# Altium PCB ECE315_F21.PcbDoc (part 1 of 2)
Units mil, origin at the board's own origin, x right, y up, seen from the top; angles counter-clockwise.
Board outline 3940 x 3940 mil, 2 copper layers (Top Layer, Bottom Layer); 72 components, 56 nets, 251 pads, 112 vias.
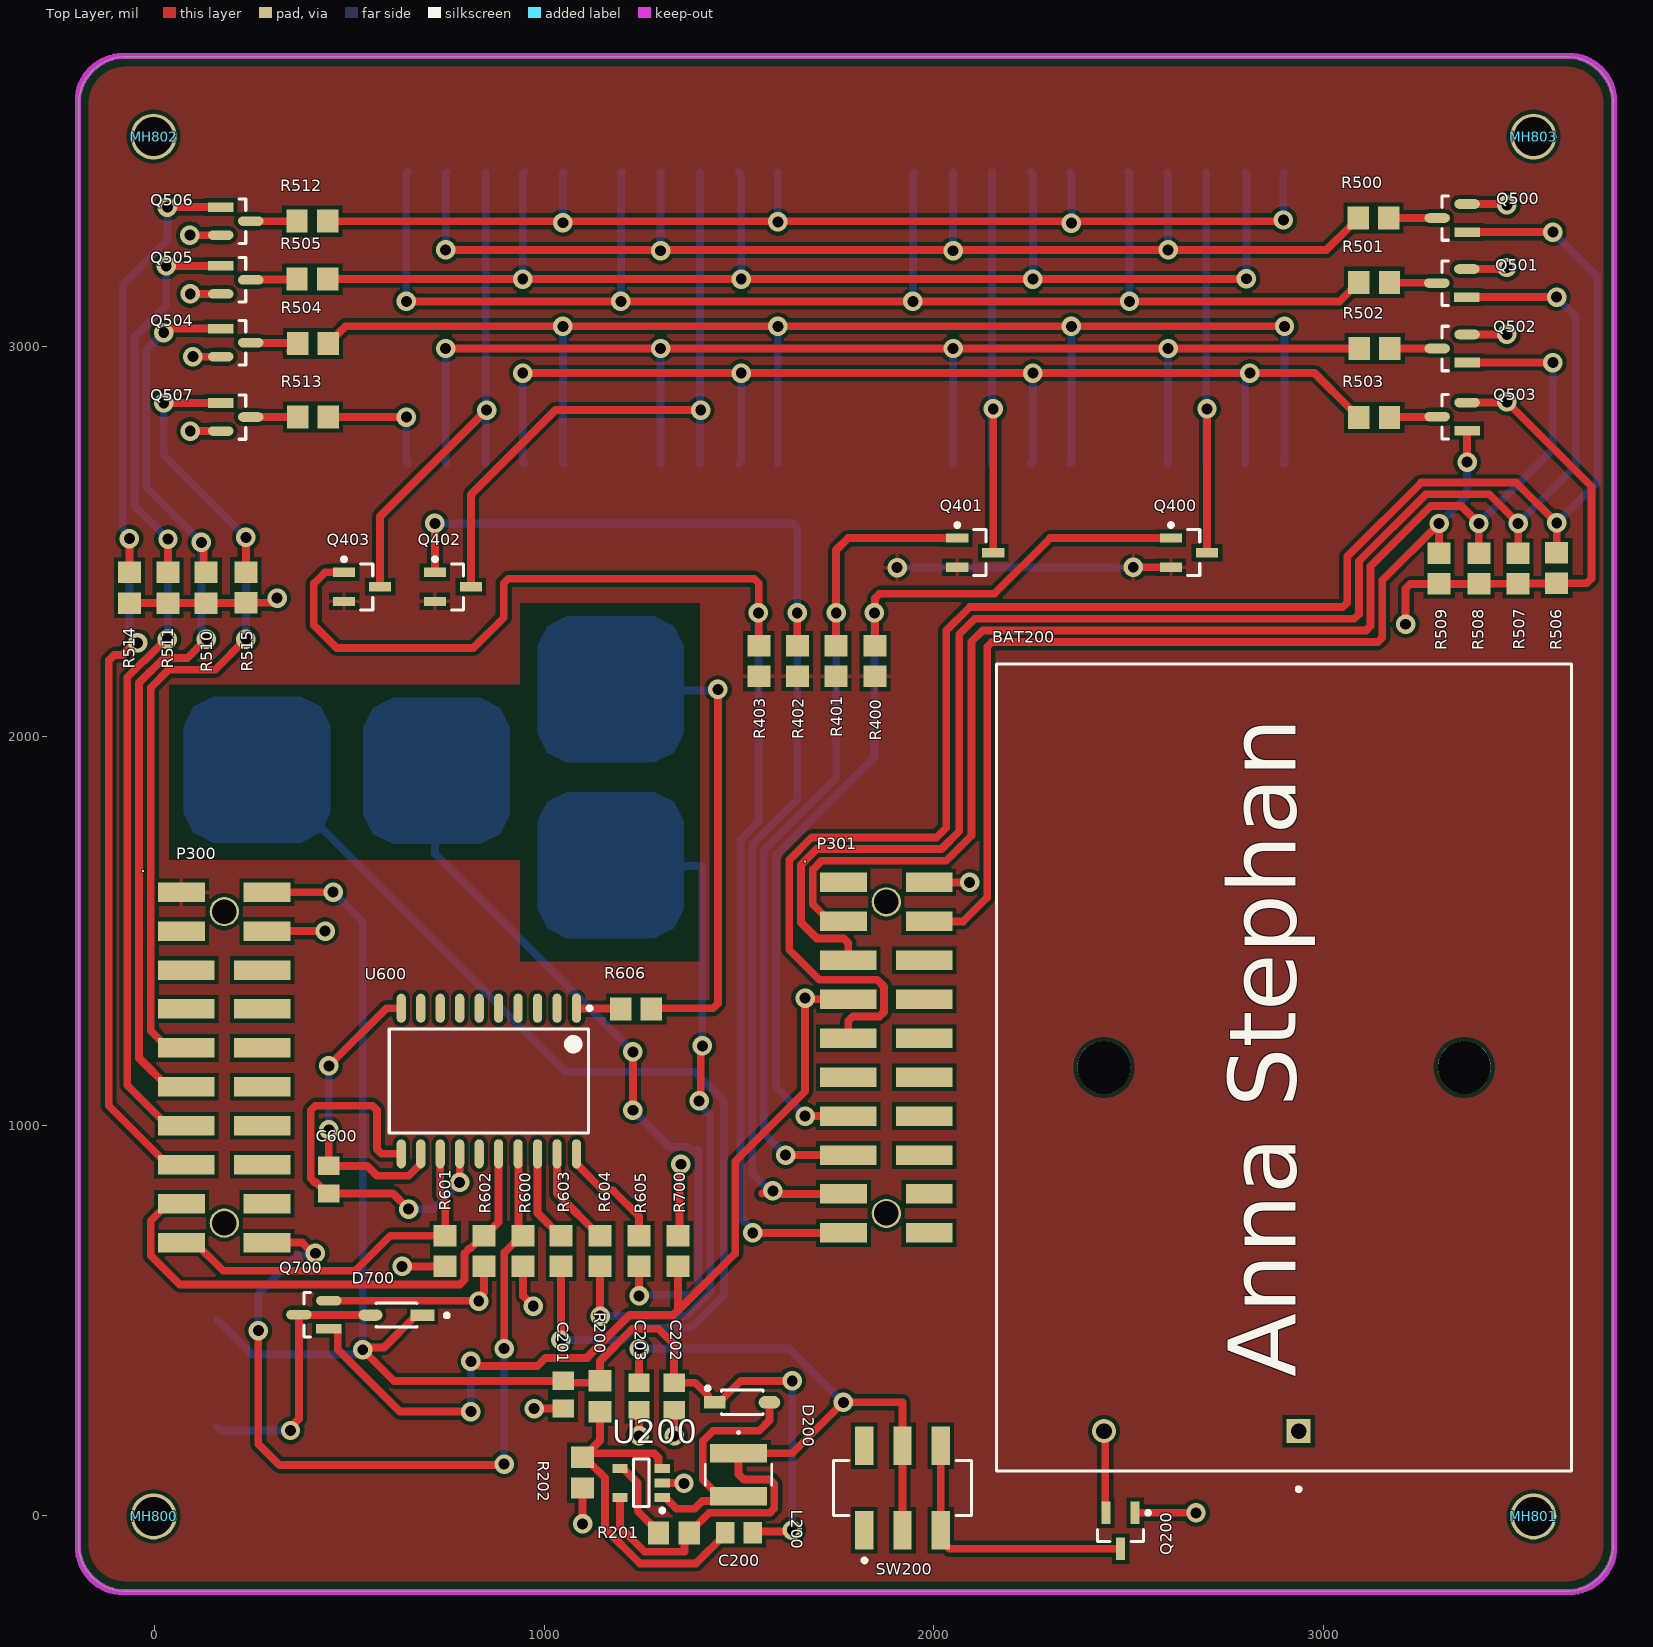
[diagram p0: Top Layer view]
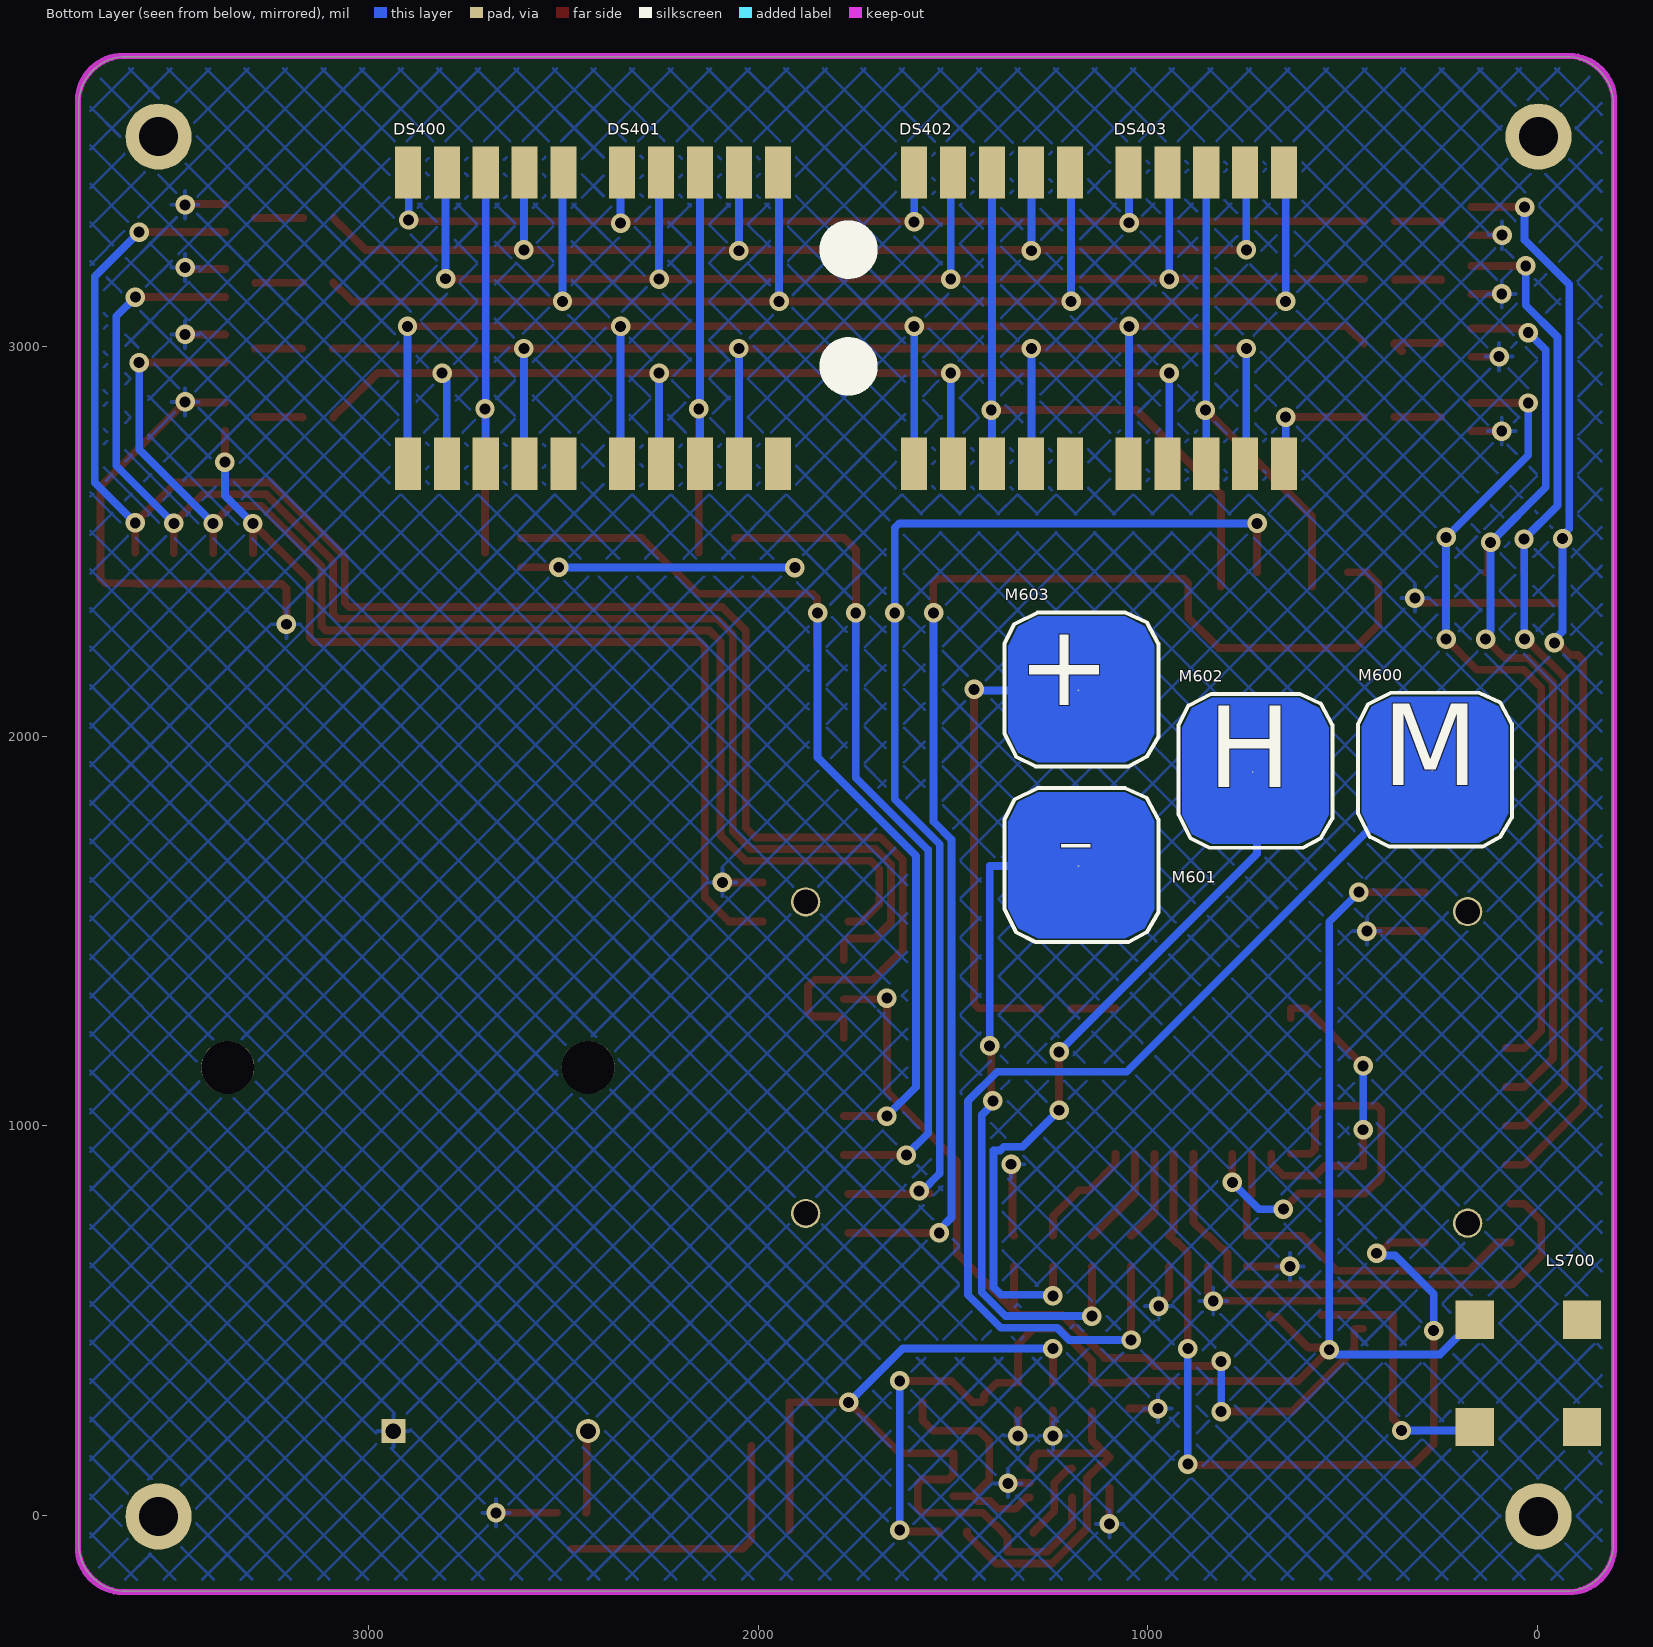
[diagram p1: Bottom Layer view, seen from below]

## Layer stack, top to bottom
Top Solder: solder mask 0.4, Solder Resist, Dk 3.5
Top Layer: signal copper 1.4
Dielectric 1: dielectric 12.6, FR-4, Dk 4.8
Bottom Layer: signal copper 1.4
Bottom Solder: solder mask 0.4, Solder Resist, Dk 3.5

## Board outline
-195,-75 -195,3625 cw(c-75,3625) -75,3745 3625,3745 cw(c3625,3625) 3745,3625 3745,-75 cw(c3625,-75) 3625,-195 -75,-195 cw(c-75,-75)

## Design rules (kind name [scope] priority, off if disabled: settings)
BoardOutlineClearance [All] p1: gap=25 ignorepadtopadclearanceinfootprint=FALSE
Clearance [All] p1: gap=10 ignorepadtopadclearanceinfootprint=FALSE except(0: Arc-Hole Track-Hole SMDPad-Hole THPad-Hole Via-Hole Fill-Hole Poly-Hole Region-Hole Text-Hole; 9: Arc-SMDPad Track-SMDPad SMDPad-SMDPad)
ComponentClearance [All] p1 off: gap=10 collisioncheckmode=3 verticalgap=10 showdistances=FALSE
HoleSize [All] p1: absolutevalues=TRUE maxlimit=200 minlimit=15 maxpercent=80.000 minpercent=20.000
MinimumAnnularRing [All] p1: minimumring=6
MinimumSolderMaskSliver [All] p1: minsoldermaskwidth=0
PolygonConnect [All] p1: connectstyle=Relief reliefconductorwidth=10 reliefentries=4 polygonreliefangle="90 Angle" airgapwidth=10
RoutingCorners [All] p1: cornerstyle=Round minsetback=100 maxsetback=100
RoutingVias [All] p1: holewidth=19.68 width=39.37 viastyle="Through Hole" minholewidth=15.75 minwidth=27.56 maxholewidth=27.56 maxwidth=7.87
SilkToSilkClearance [All] p1: silktosilkclearance=1
SilkToSolderMaskClearance [IsPad] p1: minsilkscreentomaskgap=0 clearancetoexposedcopper=TRUE
SolderMaskExpansion [All] p1: expansion=4 istentingtop=FALSE
Width Width-ArtWork [HasFootprint('BUCKYBADGER') or HasFootprint('Motion_W')] p1: maxlimit=50 minlimit=10 preferedwidth=20
Width Width_1 [All] p2: maxlimit=50 minlimit=10 preferedwidth=20
24 further rules are at their usual default settings.

## Components (designator, comment, footprint, x,y, rotation, side; value= is the part's Value field where it differs from the comment)
BAT200 "UNK_Keystone_2479_eec" Keystone_2479_0 2900,1150 r270 top locked
C200 "CAP_0805_N_001_80" CAP_0805 1500,-45.03 r0 top
C201 "CAP_0805_U_010_00" CAP_0805 1048.5,309.53 r90 top value=10µF
C202 "CAP_0805_U_010_00" CAP_0805 1333.5,304.97 r90 top value=10µF
C203 "CAP_0805_U_010_00" CAP_0805 1243.5,304.53 r90 top value=10µF
C600 "CAP_0805_U_001.00" CAP_0805 447,861.71 r90 top
D200 "SM5817PL-TP" On_Semiconductor_425-04_IPC_A 1508.43,289.97 r0 top
D700 "CGRM4004-G" Diodes_SOD123_IPC_A 620.94,514 r180 top
DS400 "ACSA56-41CGKWA-F01" ACSA56-41CGKWA-F01 2900,2700 r180 bottom locked
DS401 "ACSA56-41CGKWA-F01" ACSA56-41CGKWA-F01 2350,2700 r180 bottom locked
DS402 "ACSA56-41CGKWA-F01" ACSA56-41CGKWA-F01 1600,2700 r180 bottom locked
DS403 "ACSA56-41CGKWA-F01" ACSA56-41CGKWA-F01 1050,2700 r180 bottom locked
L200 "NRS4018T2R2MDGJ" IND_TAIYO_NRS4018_TAY 1499,104 r270 top
LS700 "CMT-8540S-SMT" CUI_CMT-8540S-SMT 22.8,364.2 r0 bottom
M600 "Mech_TouchPad" TouchPad 265,1912 r180 bottom
M601 "Mech_TouchPad" TouchPad 1173,1667 r180 bottom
M602 "Mech_TouchPad" TouchPad 726,1909 r180 bottom
M603 "Mech_TouchPad" TouchPad 1173,2118 r180 bottom
MH800 "MHOLE_2_55MM" MHOLE_2_55MM#1 25,0 r90 top
MH801 "MHOLE_2_55MM" MHOLE_2_55MM#2 3540.16,-3.15 r90 top locked
MH802 "MHOLE_2_55MM" MHOLE_2_55MM#3 0,3560 r90 top
MH803 "MHOLE_2_55MM" MHOLE_2_55MM#4 3545,3535 r90 top
P300 "20 Pin SMD" TMS-110-01-T-DV-A 178.5,1150 r0 top locked
P301 "20 Pin SMD" TMS-110-01-T-DV-A 1878.5,1175 r0 top locked
Q200 "SSM3J328R,LF" SOT-23_M 2480,-40 r270 top
Q400 "SSM3J328R,LF" SOT-23_M 2655.74,2471.74 r0 top
Q401 "SSM3J328R,LF" SOT-23_M 2106.74,2471.74 r0 top
Q402 "SSM3J328R,LF" SOT-23_M 765.74,2384 r0 top
Q403 "SSM3J328R,LF" SOT-23_M 532.24,2384 r0 top
Q500 "NDS7002A" Diodes_Inc_SOT23_IPC_A 3331.45,3331 r180 top
Q501 "NDS7002A" Diodes_Inc_SOT23_IPC_A 3330.56,3164.03 r180 top
Q502 "NDS7002A" Diodes_Inc_SOT23_IPC_A 3331.45,2996 r180 top
Q503 "NDS7002A" Diodes_Inc_SOT23_IPC_A 3331.45,2820.97 r180 top
Q504 "NDS7002A" Diodes_Inc_SOT23_IPC_A 208,3011 r0 top
Q505 "NDS7002A" Diodes_Inc_SOT23_IPC_A 208,3172.19 r0 top
Q506 "NDS7002A" Diodes_Inc_SOT23_IPC_A 208,3323 r0 top
Q507 "NDS7002A" Diodes_Inc_SOT23_IPC_A 208,2820 r0 top
Q700 "DMN6140L-13" Diodes_Inc_SOT23_IPC_A 408.55,514.98 r180 top
R200 "30K" RES_0805 1143.5,305.6 r90 top
R201 "RES_0805_K_010.00" RES_0805 1332.87,-45.03 r0 top
R202 "RES_0805_K_010.00" RES_0805 1098.5,109.34 r90 top
R400 "RES_0805_K_010.00" RES_0805 1849.72,2193.37 r270 top
R401 "RES_0805_K_010.00" RES_0805 1749.5,2193.63 r270 top
R402 "RES_0805_K_010.00" RES_0805 1650,2193.63 r270 top
R403 "RES_0805_K_010.00" RES_0805 1551,2193.37 r270 top
R500 "330" RES_0805 3129.63,3331 r180 top
R501 "330" RES_0805 3131.26,3166 r180 top
R502 "330" RES_0805 3132.37,2996 r180 top
R503 "330" RES_0805 3131.26,2819 r180 top
R504 "330" RES_0805 406.37,3009.03 r0 top
R505 "330" RES_0805 404.63,3174.16 r0 top
R506 "RES_0805_K_010.00" RES_0805 3600,2432.37 r90 top
R507 "RES_0805_K_010.00" RES_0805 3501,2431.37 r90 top
R508 "RES_0805_K_010.00" RES_0805 3400,2431 r90 top
R509 "RES_0805_K_010.00" RES_0805 3298,2431 r90 top
R510 "RES_0805_K_010.00" RES_0805 132,2381.58 r90 top
R511 "RES_0805_K_010.00" RES_0805 34,2381.58 r90 top
R512 "330" RES_0805 404.63,3323 r0 top
R513 "330" RES_0805 406.37,2820 r0 top
R514 "RES_0805_K_010.00" RES_0805 -65,2381.58 r90 top
R515 "RES_0805_K_010.00" RES_0805 234,2382.58 r90 top
R600 "47.5K" RES_0805 945.71,678.37 r270 top
R601 "RES_0805_K_010.00" RES_0805 745.71,678.37 r270 top
R602 "RES_0805_K_010.00" RES_0805 845.71,678.37 r270 top
R603 "47.5K" RES_0805 1043.5,678.37 r90 top
R604 "47.5K" RES_0805 1143.5,678.37 r90 top
R605 "47.5K" RES_0805 1243.5,678.37 r90 top
R606 "47.5K" RES_0805 1236.1,1300 r180 top
R700 "RES_0805_K_010.00" RES_0805 1343.8,678.37 r270 top
SW200 "JS202011SCQN" C&K_Components_0_MFG 1920,69.97 r0 top
U200 "LM2735XMF-NOPB" LM2735-SOT23-S 1249,83 r180 top
U600 "IC_AT42QT2120" AT42QT2120-SOIC 858,1115 r270 top

## Footprints (in the part's own frame and the unit in brackets; to place one, negate y for a bottom-side part, rotate by r counter-clockwise, add the part's x,y. Pads: shape width x height; smd on the part's side, far side on the other; paste and mask are expansions set on the pad)
ACSA56-41CGKWA-F01 [mm]
  rect 1.7x3.4 smd: 1(0,0) 2(2.54,0) 3(5.08,0) 4(7.62,0) 5(10.16,0) 6(10.16,19) 7(7.62,19) 8(5.08,19) 9(2.54,19) 10(0,19)
  body extent -1.12,0.03 11.28,19.03, height 3.8
AT42QT2120-SOIC [mm] "SOIC, 20-Leads, Body 12.80x7.50mm, Pitch 1.27mm, IPC Medium Density"
  oval 1.9x0.6 smd: 1(-4.75,5.715) 2(-4.75,4.445) 3(-4.75,3.175) 4(-4.75,1.905) 5(-4.75,0.635) 6(-4.75,-0.635) 7(-4.75,-1.905) 8(-4.75,-3.175) 9(-4.75,-4.445) 10(-4.75,-5.715) 11(4.75,-5.715) 12(4.75,-4.445) 13(4.75,-3.175) 14(4.75,-1.905) 15(4.75,-0.635) 16(4.75,0.635) 17(4.75,1.905) 18(4.75,3.175) 19(4.75,4.445) 20(4.75,5.715)
  silkscreen extent -4.87,-6.5 3.4,6.69, body extent -3.8,-6.5 3.8,6.5, height 2.35
C&K_Components_0_MFG [mm]
  rect 1.2x2.5 smd paste+0 mask+0: 1(-2.5,-2.75) 2(0,-2.75) 3(2.5,-2.75) 4(-2.5,2.75) 5(0,2.75) 6(2.5,2.75)
  silkscreen extent -4.5,-4.85 4.5,1.8, body extent -4.5,-3.75 4.5,3.75, height 5.51
CAP_0805 [mm]
  rect 1.2x1.4 smd: 1(-0.9,0) 2(0.9,0)
  body extent -1.07,-0.7 1.07,0.7, height 0.7
CUI_CMT-8540S-SMT [mm]
  rect 2.5x2.5 smd: M1(-3.5,-3.5) M2(-3.5,3.5) N(3.5,3.5) P(3.5,-3.5)
Diodes_Inc_SOT23_IPC_A [mm]
  rect 1.659x0.627 smd paste+0 mask+0: 1(-0.977,0.915)
  rrect100% 1.659x0.627 smd paste+0 mask+0: 2(-0.977,-0.915) 3(0.977,0)
  silkscreen extent 0.23,-1.45 0.65,1.45, body extent -2.31,-1.95 2.31,1.95, height 0.25
Diodes_SOD123_IPC_A [mil]
  rect 61.32x29.23 smd paste+0 mask+0: 1(-66.94,0)
  rrect100% 61.32x29.23 smd paste+0 mask+0: 2(66.94,0)
  silkscreen extent -134,-31 52,31, body extent -117,-50 117,50, height 10
IND_TAIYO_NRS4018_TAY [mil]
  rect 47x146 smd paste+0 mask+0: 1(-55,0) 2(55,0)
  silkscreen extent -111,-86 28,86, body extent -81,-81 81,81, height 71
Keystone_2479_0 [mm]
  rect 1.57x1.57 hole 1.02 paste-1000 mask+0: 1(23.72,0.95)
  round 1.57 hole 1.02 paste-1000 mask+0: 2(23.72,-11.75)
  round 3.45 hole 3.45 unplated paste-1000 mask+0: ""(0,11.75) ""(0,-11.75)
  silkscreen extent -26.31,-18.74 27.63,18.74, body extent -26.93,-19.1 26.93,19.1, height 0.25
LM2735-SOT23-S [mm] "SOT23, 5-Leads, Body 2.90x2.80mm, Pitch 0.95mm, IPC Medium Density"
  rect 1x0.6 smd: 1(-1.375,0.95) 2(-1.375,0) 3(-1.375,-0.95) 4(1.375,-0.95) 5(1.375,0.95)
  silkscreen extent -1.5,-1.55 0.5,1.92, body extent -0.88,-1.52 0.87,1.53, height 1.45
MHOLE_2_55MM#1 [mm] "2.55MM Mounting Hole"
  round 3 / inner round 4.572 / far side round 4.318 hole 2.55: 1(-0.08,0.715)
MHOLE_2_55MM#2 [mm] "2.55MM Mounting Hole"
  round 3 / inner round 4.572 / far side round 4.318 hole 2.55: 1(0,0)
MHOLE_2_55MM#3 [mm] "2.55MM Mounting Hole"
  round 3 / inner round 4.572 / far side round 4.318 hole 2.55: 1(-0.504,0.08)
MHOLE_2_55MM#4 [mm] "2.55MM Mounting Hole"
  round 3 / inner round 4.572 / far side round 4.318 hole 2.55: 1(0.131,0.123)
On_Semiconductor_425-04_IPC_A [mm]
  rect 1.408x0.822 smd paste+0 mask+0: 1(-1.78,0)
  rrect100% 1.408x0.822 smd paste+0 mask+0: 2(1.78,0)
  silkscreen extent -2.37,-0.8 1.35,1.04, body extent -2.98,-1.3 2.98,1.3, height 0.25
RES_0805 [mm]
  rect 1.4x1.5 smd: 1(-1,0) 2(1,0)
  body extent -1.07,-0.7 1.07,0.7, height 0.7
SOT-23_M [mm]
  rect 1.45x0.6 smd: 1(-1.175,0.95) 2(-1.175,-0.95) 3(1.175,0)
  silkscreen extent -1.3,-1.5 0.7,1.93, body extent -0.7,-1.5 0.7,1.5, height 1.1
TMS-110-01-T-DV-A [mil] "Samtech 20 pin SMD with guide"
  rect 120x50 smd: 1(-110,450) 2(110,450) 3(-110,350) 4(110,350) 17(-110,-350) 18(110,-350) 19(-110,-450) 20(110,-450)
  rect 145x50 smd: 5(-97.5,250) 6(97.5,250) 7(-97.5,150) 8(97.5,150) 9(-97.5,50) 10(97.5,50) 11(-97.5,-50) 12(97.5,-50) 13(-97.5,-150) 14(97.5,-150) 15(-97.5,-250) 16(97.5,-250)
  round 75 hole 63: ""(0,-400) ""(0,400)
  body extent -140,-493 150,507, height 470
TouchPad [mm]
  round 0.1 smd: 1(-0.127,0)
  Top Layer region: 4.826,2.921 4.826,-2.794 4.191,-4.064 2.921,-4.699 -2.794,-4.699 -4.064,-4.064 -4.699,-2.794 -4.699,2.921 -4.064,4.191 -2.794,4.826 2.921,4.826 4.191,4.191
  silkscreen extent -4.95,-4.95 5.08,5.08

## Part data
BAT200: "BATTERY HOLDER AAA 3 CELL PC PIN", Digikey Part Number=36-2479-ND, Manufacturer=Keystone, Manufacturer 1="Keystone Electronics", Manufacturer Part Number 1=2479, Mouser Part Number=534-2479, Package=CONN_BAT_HOLDER_3_AAA, Package Quantity=1, Temperature=to, Body Material=Polypropylene, Category="Batteries and Accessories", ComponentLink1Description=Upverter, ComponentLink1URL=https://upverter.com/upn/revision/5489a3afbecc8c6e/, ComponentLink2Description=Datasheet, ComponentLink2URL=http://www.keyelco.com/product-pdf.cfm?p=1041, ComponentLink3Description=https://datasheet.ciiva.com/1391/1718224-1391618.pdf?src-supplier=Element14, ComponentLink3URL=https://datasheet.ciiva.com/1391/1718224-1391618.pdf?src-supplier=Element14, ComponentLink4Description=https://datasheet.ciiva.com/4/2479-4180.pdf?src-supplier=Digi-Key, ComponentLink4URL=https://datasheet.ciiva.com/4/2479-4180.pdf?src-supplier=Digi-Key, ComponentLink5Description=https://datasheet.ciiva.com/20221/18-3680-20221687.pdf?src-supplier=Rapid+Electronics, ComponentLink5URL=https://datasheet.ciiva.com/20221/18-3680-20221687.pdf?src-supplier=Rapid+Electronics, Contact Material=Brass, Contact Type=Spring, Digikey Description="UNK HOLDER BATTERY 3CELL AAA PC MNT", helpURL=https://upverter.com/upn/revision/5489a3afbecc8c6e/, Lead Free=yes, Material=Steel,Plastic, Mount="Through Hole,PCB", Mounting Type="PCB, Through Hole", Number of Batteries=3, Number of Cells=3, Packaging=Bulk, Part Number=2479, Price=1.03768733885, Pricing 1="1=1.71000, 25=1.49600, 100=1.19500, 250=1.09916, 500=1.03154, 1000=0.96389, 2500=0.87370, 5000=0.80043 (USD)", REACH SVHC="No SVHC", RoHS=TRUE, Series=-, Stock 1=3670, Supplier 1=Digi-Key, Supplier 2=Mouser, Supplier Part Number 1=36-2479-ND, Supplier Part Number 2=534-2479, Termination="PC Pin", Wire/Cable Gauge=26AWG
C200: "MURATA - GRM2165C1H182JA01D - SMD Multilayer Ceramic Capacitor, 1800 pF, 50 V, 0805 [2012 Metric], ± 5%, C0G / NP0, GRM Series", Capacitance=1.8nF, Case Code (Imperial)=0805, Case Code (Metric)=2012, Dielectric=C0G, Manufacturer 1=Murata, Manufacturer Part Number 1=GRM2165C1H182JA01D, Max Operating Temperature=125°C, Min Operating Temperature=-55°C, Package Quantity=1, Supplier Part Number 1=490-1626-1-ND, Temperature Coefficient=30ppm/°C, Tolerance=5%, Voltage=50V, Case/Package=0805, Category="Ceramic Capacitors", ComponentLink1Description=https://datasheet.ciiva.com/25730/cl21a106kpclqnc-25730594.pdf, ComponentLink1URL=https://datasheet.ciiva.com/25730/cl21a106kpclqnc-25730594.pdf, ComponentLink2Description=https://datasheet.ciiva.com/134/partnumbering-e-01-134098.pdf?src-supplier=Digi-Key, ComponentLink2URL=https://datasheet.ciiva.com/134/partnumbering-e-01-134098.pdf?src-supplier=Digi-Key, ComponentLink3Description=https://datasheet.ciiva.com/26920/getdatasheetpartid-355170-26920201.pdf, ComponentLink3URL=https://datasheet.ciiva.com/26920/getdatasheetpartid-355170-26920201.pdf, ComponentLink4Description=https://datasheet.ciiva.com/134/partnumbering-e-01-134100.pdf?src-supplier=Digi-Key, ComponentLink4URL=https://datasheet.ciiva.com/134/partnumbering-e-01-134100.pdf?src-supplier=Digi-Key, ComponentLink5Description=https://datasheet.ciiva.com/134/partnumbering-e-01-134099.pdf?src-supplier=Digi-Key, ComponentLink5URL=https://datasheet.ciiva.com/134/partnumbering-e-01-134099.pdf?src-supplier=Digi-Key, Construction=Flat, Depth=1.25mm, Height=0.6mm, Lead Free="Lead Free", Length=2mm, Mount="Surface Mount", Packaging="Tape and Reel", Pricing 1="1=0.20000, 10=0.14000, 50=0.08380, 100=0.07080, 500=0.04844, 1000=0.04285 (USD)", Radiation Hardening=No, REACH SVHC="No SVHC", RoHS=Yes, RoHS Compliant=Yes, Series=GRM, Stock 1=44565, Supplier 1=Digi-Key, Termination=SMD/SMT, Thickness=0.028inch, Voltage Rating=50V, Voltage Rating (DC)=50V, Width=0.049inch
C201 C202 C203: "CAP CER 10UF 10V X5R 0805", Manufacturer="Samsung Electro-Mechanics America, Inc.", Manufacturer Part Number=CL21A106KPCLQNC, Operating Temperature="-55°C ~ 85°C", Package / Case="0805 (2012 Metric)", Ratings=-, Supplier Part Number 1=1276-2402-1-ND, Temperature Coefficient=X5R, Tolerance=±10%, Voltage - Rated=10V, Applications="General Purpose", Category=Capacitors, ComponentLink1Description=http://media.digikey.com/pdf/Data%20Sheets/Samsung%20PDFs/CL21A106KPCLQNC_character.pdf, ComponentLink1URL=http://media.digikey.com/pdf/Data%20Sheets/Samsung%20PDFs/CL21A106KPCLQNC_character.pdf, Features=-, Height - Seated (Max)=-, Lead Spacing=-, Lead Style=-, Mounting Type="Surface Mount, MLCC", Packaging="Cut Tape (CT)", Pricing 1="1=0.2, 10=0.14, 25=0.1052, 50=0.0806, 100=0.0665, 500=0.0469, 1000=0.0385 (USD)", RoHS="RoHS Compliant", Size / Dimension="0.079\" L x 0.049\" W (2.00mm x 1.25mm)", Stock 1=97192, Supplier 1=Digi-Key, Thickness (Max)="0.037\" (0.95mm)"
C600: "CAP CER 1UF 16V 10% X7R 0805", Capacitance="1 uF", Capacitance - nF="1000 nF", Case Code - in=0805, Case Code - mm=2012, Case Height="0.9 mm", Case Length="2 mm", Case Width="1.2 mm", Dielectric=X7R, Manufacturer=Kemet, Manufacturer Part Number=C0805C105K4RACTU, Maximum Operating Temperature="+ 125 C", Minimum Operating Temperature="- 55 C", Operating Temperature Range="- 55 C to + 125 C", Package / Case="0805 (2012 metric)", Supplier Part Number 1=399-1284-1-ND, Temperature Coefficient / Code="+/- 15 %", Tolerance="10 %", Voltage Rating="16 V", Brand=Kemet, Class="Class 1", ComponentLink1Description=https://datasheet.ciiva.com/14585/70095383-14585511.pdf, ComponentLink1URL=https://datasheet.ciiva.com/14585/70095383-14585511.pdf, ComponentLink2Description=https://datasheet.ciiva.com/6074/1722731-6074364.pdf, ComponentLink2URL=https://datasheet.ciiva.com/6074/1722731-6074364.pdf, ComponentLink3Description=https://datasheet.ciiva.com/14603/70095383-14603388.pdf, ComponentLink3URL=https://datasheet.ciiva.com/14603/70095383-14603388.pdf, ComponentLink4Description=https://datasheet.ciiva.com/28692/1851736-28692942.pdf, ComponentLink4URL=https://datasheet.ciiva.com/28692/1851736-28692942.pdf, ComponentLink5Description=https://datasheet.ciiva.com/39122/docfinderpartnumberc0402c102k5ractu-39122926.pdf, ComponentLink5URL=https://datasheet.ciiva.com/39122/docfinderpartnumberc0402c102k5ractu-39122926.pdf, Dimensions="1.2 mm W x 2 mm L x 0.9 mm H", Dissipation Factor DF=5, Factory Pack Quantity=2500, Lead Spacing="0.75 mm", Packaging=Reel, Part # Aliases=C0805C105K4RAC7800, Pricing 1="1=0.12, 10=0.087, 100=0.0407, 500=0.0286, 1000=0.0236 (USD)", Product="General Type MLCCs", Product Category="Multilayer Ceramic Capacitors MLCC - SMD/SMT", RoHS=Details, Series=C0805C, Stock 1=692931, Supplier 1=Digikey, Termination Style=SMD/SMT, Type="SMD MLCC X7R 6.3 - 250 VDC Commerical Grade", Voltage Rating DC="16 V"
D200: "DIODE SCHOTTKY 20V 1A SOD123FL", Average Rectified Current=1A, Forward Voltage=450mV, Manufacturer 2=MCC, Max Operating Temperature=125°C, Max Reverse Voltage (DC)=20V, Max Surge Current=30A, Min Operating Temperature=-65°C, Package Quantity=1, Supplier Part Number 1=SM5817PL-TPMSCT-ND, Category="Rectifier Diodes", ComponentLink1Description=https://datasheet.ciiva.com/15200/getdatasheetpartid-487494-15200581.pdf?src-supplier=Verical, ComponentLink1URL=https://datasheet.ciiva.com/15200/getdatasheetpartid-487494-15200581.pdf?src-supplier=Verical, ComponentLink2Description=https://datasheet.ciiva.com/912/sm5817pl-sm5819plsod-123fl-912827.pdf?src-supplier=Digi-Key, ComponentLink2URL=https://datasheet.ciiva.com/912/sm5817pl-sm5819plsod-123fl-912827.pdf?src-supplier=Digi-Key, Element Configuration=Single, Manufacturer Part Number 2=SM5817PL-TP, Mount="Surface Mount", Number of Pins=2, Packaging="Tape and Reel", Peak Non-Repetitive Surge Current=30A, Pricing 2="1=0.46000, 10=0.31900, 100=0.16110, 500=0.13144, 1000=0.09752 (USD)", Radiation Hardening=No, Reverse Voltage=20V, RoHS=Yes, RoHS Compliant=Yes, Stock 2=178040, Supplier 1=Digi-Key
D700: "DIODE GEN PURP 400V 1A MINISMA", Average Rectified Current=1A, Manufacturer 1=Comchip, Max Reverse Current=5uA, Max Reverse Voltage (DC)=400V, Max Surge Current=30A, Package Quantity=1, Supplier Part Number 1=641-1329-1-ND, Category="Rectifier Diodes", ComponentLink1Description=https://datasheet.ciiva.com/912/cgrm4001-gthru-cgrm4007-grevd-912412.pdf?src-supplier=Digi-Key, ComponentLink1URL=https://datasheet.ciiva.com/912/cgrm4001-gthru-cgrm4007-grevd-912412.pdf?src-supplier=Digi-Key, ComponentLink2Description=https://datasheet.ciiva.com/912/cgrm4001-gthru-cgrm4007-grevd-912413.pdf?src-supplier=Digi-Key, ComponentLink2URL=https://datasheet.ciiva.com/912/cgrm4001-gthru-cgrm4007-grevd-912413.pdf?src-supplier=Digi-Key, ComponentLink3Description=https://datasheet.ciiva.com/912/cgrm4001-gthru-cgrm4007-grevd-912414.pdf?src-supplier=Digi-Key, ComponentLink3URL=https://datasheet.ciiva.com/912/cgrm4001-gthru-cgrm4007-grevd-912414.pdf?src-supplier=Digi-Key, Manufacturer Part Number 1=CGRM4004-G, Mount="Surface Mount", Packaging="Tape and Reel", Pricing 1="1=0.41000, 10=0.30400, 100=0.17190, 500=0.11384, 1000=0.08728 (USD)", Reverse Voltage=400V, RoHS=Yes, RoHS Compliant=Yes, Stock 1=345536, Supplier 1=Digi-Key
DS400 DS401 DS402 DS403: "DISPLAY 0.56\" SGL 574NM GRN SMD", Case/Package=SMD/SMT, Color=Green, Forward Current=30mA, Forward Voltage=2.1V, Manufacturer 1=Kingbright, Max Operating Temperature=85°C, Max Power Dissipation=75mW, Min Operating Temperature=-40°C, Package Quantity=400, Supplier Part Number 1=754-1033-1-ND, Test Current=20mA, Category="LED Displays", ComponentLink1Description=https://datasheet.ciiva.com/2103/acsa56-41cgkwa-f01-2103794.pdf?src-supplier=Digi-Key, ComponentLink1URL=https://datasheet.ciiva.com/2103/acsa56-41cgkwa-f01-2103794.pdf?src-supplier=Digi-Key, ComponentLink2Description=https://datasheet.ciiva.com/4421/acsa56-41cgkwa-f01-17964-4421697.pdf?src-supplier=Mouser, ComponentLink2URL=https://datasheet.ciiva.com/4421/acsa56-41cgkwa-f01-17964-4421697.pdf?src-supplier=Mouser, ComponentLink3Description=https://datasheet.ciiva.com/16287/acsa56-41cgkwa-f01-16287523.pdf?src-supplier=Future+Electronics, ComponentLink3URL=https://datasheet.ciiva.com/16287/acsa56-41cgkwa-f01-16287523.pdf?src-supplier=Future+Electronics, ComponentLink4Description=https://datasheet.ciiva.com/2103/acsa56-41cgkwa-f01-2103795.pdf?src-supplier=Digi-Key, ComponentLink4URL=https://datasheet.ciiva.com/2103/acsa56-41cgkwa-f01-2103795.pdf?src-supplier=Digi-Key, ComponentLink5Description=https://datasheet.ciiva.com/2103/acsa56-41cgkwa-f01-2103796.pdf?src-supplier=Digi-Key, ComponentLink5URL=https://datasheet.ciiva.com/2103/acsa56-41cgkwa-f01-2103796.pdf?src-supplier=Digi-Key, Display Type=Segment, Element Configuration="Common Anode", Height=0.669inch, Illumination Color=Green, Lead Free="Lead Free", Luminous Intensity=25mcd, Manufacturer Part Number 1=ACSA56-41CGKWA-F01, Number of Characters=1, Operating Supply Voltage=2.1V, Packaging=Rail/Tube, Power Consumption=75mW, Pricing 1="1=3.38000, 10=2.25300, 100=1.73360 (USD)", RoHS=Yes, RoHS Compliant=Yes, Stock 1=38128, Supplier 1=Digi-Key, Wavelength=570nm, Width=0.488inch
L200: "Inductor Power Shielded Wirewound 2.2uH 20% 100KHz Ferrite 2.2A 0.0504Ohm DCR 1515 T/R", Case/Package=Nonstandard, Current Rating=2.2A, DC Resistance (DCR)=50.4mR, Inductance=2.2uH, Inductance Tolerance=20%, Manufacturer 1="Taiyo Yuden", Max DC Current=3A, Max Operating Temperature=125°C, Min Operating Temperature=-25°C, Package Quantity=3500, Resistor Type=Wirewound, Self Resonant Frequency=60MHz, Supplier Part Number 1=587-2890-1-ND, Test Frequency=100kHz, Category="Fixed Inductors", ComponentLink1Description=https://datasheet.ciiva.com/8502/nr6028t2r2n-ss-8502679.pdf?src-supplier=Avnet, ComponentLink1URL=https://datasheet.ciiva.com/8502/nr6028t2r2n-ss-8502679.pdf?src-supplier=Avnet, ComponentLink2Description=https://datasheet.ciiva.com/15988/8nr6028t2r2n-15988110.pdf?src-supplier=Onlinecomponents.com, ComponentLink2URL=https://datasheet.ciiva.com/15988/8nr6028t2r2n-15988110.pdf?src-supplier=Onlinecomponents.com, ComponentLink3Description=https://datasheet.ciiva.com/7291/nr6028t2r2n-ss-7291637.pdf?src-supplier=Newark, ComponentLink3URL=https://datasheet.ciiva.com/7291/nr6028t2r2n-ss-7291637.pdf?src-supplier=Newark, ComponentLink4Description=https://datasheet.ciiva.com/1043/wound04-e-1043090.pdf?src-supplier=Digi-Key, ComponentLink4URL=https://datasheet.ciiva.com/1043/wound04-e-1043090.pdf?src-supplier=Digi-Key, ComponentLink5Description=https://datasheet.ciiva.com/1043/wound04-e-1043091.pdf?src-supplier=Digi-Key, ComponentLink5URL=https://datasheet.ciiva.com/1043/wound04-e-1043091.pdf?src-supplier=Digi-Key, ComponentLink6Description=https://datasheet.ciiva.com/1043/wound04-e-1043092.pdf?src-supplier=Digi-Key, ComponentLink6URL=https://datasheet.ciiva.com/1043/wound04-e-1043092.pdf?src-supplier=Digi-Key, ComponentLink7Description=https://datasheet.ciiva.com/8502/nrs4018t2r2mdgj-ss-8502646.pdf?src-supplier=Avnet, ComponentLink7URL=https://datasheet.ciiva.com/8502/nrs4018t2r2mdgj-ss-8502646.pdf?src-supplier=Avnet, ComponentLink8Description=https://datasheet.ciiva.com/7291/nrs4018t2r2mdgj-ss-7291680.pdf?src-supplier=Newark, ComponentLink8URL=https://datasheet.ciiva.com/7291/nrs4018t2r2mdgj-ss-7291680.pdf?src-supplier=Newark, ComponentLink9Description=https://datasheet.ciiva.com/25607/0900766b810b3cd2-25607949.pdf?src-supplier=RSComponents, ComponentLink9URL=https://datasheet.ciiva.com/25607/0900766b810b3cd2-25607949.pdf?src-supplier=RSComponents, Core Material=Ferrite, Depth=4.2mm, Halogen Free="Halogen Free", Height=1.8mm, Height - Seated (Max)=0.071inch, Lead Free="Lead Free", Lead Pitch=2.8mm, Length=4mm, Manufacturer Part Number 1=NRS4018T2R2MDGJ, Mount="Surface Mount", Number of Pins=2, Packaging="Tape and Reel", Pricing 1="1=0.27000, 10=0.23800, 25=0.20840, 50=0.17860, 100=0.16370, 250=0.14884, 500=0.13990, 1000=0.10716 (USD)", Radiation Hardening=No, REACH SVHC=Unknown, RMS Current (Irms)=2.2A, RoHS=Yes, RoHS Compliant=Yes, Saturation Current=3A, Series=NRS, Shielding=Shielded, Stock 1=291635, Supplier 1=Digi-Key, Termination=SMD/SMT, Tolerance=20%, Width=0.157inch
LS700: "AUDIO MAGNETIC XDCR 1-6V SMD", Frequency=4kHz, Manufacturer 1=CUI, Manufacturer Part Number 1=CMT-8540S-SMT-TR, Max Operating Temperature=70°C, Min Operating Temperature=-20°C, Operating Supply Current=150mA, Package="CUI Inc.", Supplier Part Number 1=102-3746-1-ND, Voltage Rating=5V, Availability=Unavailable, Category="Audio Products", ComponentLink1Description=https://www.cui.com/product/resource/digikeypdf/cmt-8540s-smt.pdf?src-supplier=Digi-Key, ComponentLink1URL=https://www.cui.com/product/resource/digikeypdf/cmt-8540s-smt.pdf?src-supplier=Digi-Key, CUI_purchase_URL=https://www.cuidevices.com/product/audio/buzzers/audio-transducers/cmt-8540s-smt-tr?utm_source=snapeda.com&utm_medium=referral&utm_campaign=snapedaBOM, Lead Free="Lead Free", MF="CUI Devices", MP=CMT-8540S-SMT-TR, Price=None, Pricing 1="1=3.23000, 10=2.67000, 25=2.46400, 50=2.31400, 100=2.16990, 500=1.91520 (USD)", RoHS=Yes, Sensing Method=Magnetic, SnapEDA_Link=https://www.snapeda.com/parts/CMT-8540S-SMT-TR/CUI%20Devices/view-part/587791/?ref=snap, Stock 1=66147, Supplier 1=Digi-Key
M600 M601 M602 M603: "Capacative Touch Sensor Pad"
MH800 MH801 MH802 MH803: "Mounting Holde", Manufacturer Part Number="UW MTHOLE"
P300 P301: library part TSM-110-02-T-DV-A, "Conn Unshrouded Header HDR 20 POS 2.54mm Solder ST SMD Tube", Manufacturer Part Number=TSM-110-02-T-DV-A-P-TR, Supplier Part Number 1=78P2391, Supplier 1=Newark
Q200 Q400 Q401 Q402 Q403: "MOSFET P-CH 20V 6A SOT23F", Case/Package=SOT-23-3, Continuous Drain Current (ID)=6A, Drain to Source Breakdown Voltage=-20V, Drain to Source Resistance=47.4mR, Drain to Source Voltage (Vdss)=20V, Gate to Source Voltage (Vgs)=8V, Input Capacitance=840pF, Manufacturer 1=Toshiba, Max Operating Temperature=150°C, Max Power Dissipation=1W, Min Operating Temperature=-55°C, Package Quantity=3000, Power Dissipation=2W, Supplier Part Number 1=SSM3J328RLFCT-ND, Category=MOSFETs, ComponentLink1Description=https://datasheet.ciiva.com/11158/ssm3j328r-datasheet-en-20140301-11158652.pdf?src-supplier=Avnet, ComponentLink1URL=https://datasheet.ciiva.com/11158/ssm3j328r-datasheet-en-20140301-11158652.pdf?src-supplier=Avnet, ComponentLink2Description=https://datasheet.ciiva.com/24106/ssm3j328r-datasheet-en-20140301-24106699.pdf?src-supplier=Mouser, ComponentLink2URL=https://datasheet.ciiva.com/24106/ssm3j328r-datasheet-en-20140301-24106699.pdf?src-supplier=Mouser, ComponentLink3Description=https://datasheet.ciiva.com/45425/ssm3j328r-datasheet-en-20140301-45425519.pdf?src-supplier=Digi-Key, ComponentLink3URL=https://datasheet.ciiva.com/45425/ssm3j328r-datasheet-en-20140301-45425519.pdf?src-supplier=Digi-Key, ComponentLink4Description=https://datasheet.ciiva.com/45425/ssm3j328r-datasheet-en-20140301-45425813.pdf?src-supplier=Digi-Key, ComponentLink4URL=https://datasheet.ciiva.com/45425/ssm3j328r-datasheet-en-20140301-45425813.pdf?src-supplier=Digi-Key, Element Configuration=Single, Manufacturer Part Number 1=SSM3J328R,LF, Mount="Surface Mount", Number of Channels=1, Number of Elements=1, Number of Pins=3, Packaging="Tape and Reel", Polarity=P-CHANNEL, Pricing 1="1=0.43000, 10=0.32200, 25=0.29040, 100=0.20060, 500=0.13728, 1000=0.10560 (USD)", Radiation Hardening=No, Rds On Max=29.8mR, RoHS=Yes, RoHS Compliant=Yes, Stock 1=476474, Supplier 1=Digi-Key, Turn-Off Delay Time=107ns, Turn-On Delay Time=32ns
Q500 Q501 Q502 Q503 Q504 Q505 Q506 Q507: "FAIRCHILD SEMICONDUCTOR         NDS7002A.            MOSFET, FULL REEL", Case/Package=SOT-23, Continuous Drain Current (ID)=280mA, Drain to Source Breakdown Voltage=60V, Drain to Source Resistance=1.2R, Gate to Source Voltage (Vgs)=20V, Input Capacitance=50pF, Manufacturer 1="ON Semiconductor / Fairchild", Max Operating Temperature=150°C, Max Power Dissipation=300mW, Min Operating Temperature=-65°C, On-State Resistance=2R, Package Quantity=1, Supplier Part Number 1=NDS7002ACT-ND, Threshold Voltage=2.1V, Category=MOSFETs, ComponentLink1Description=https://datasheet.ciiva.com/29746/dmn6140l-29746783.pdf?src-supplier=Digi-Key, ComponentLink1URL=https://datasheet.ciiva.com/29746/dmn6140l-29746783.pdf?src-supplier=Digi-Key, ComponentLink2Description=https://datasheet.ciiva.com/4444/ds30896-81375-4444887.pdf?src-supplier=Mouser, ComponentLink2URL=https://datasheet.ciiva.com/4444/ds30896-81375-4444887.pdf?src-supplier=Mouser, ComponentLink3Description=https://datasheet.ciiva.com/1254/ds30896-1254496.pdf?src-supplier=Newark, ComponentLink3URL=https://datasheet.ciiva.com/1254/ds30896-1254496.pdf?src-supplier=Newark, ComponentLink4Description=https://datasheet.ciiva.com/25624/0900766b81151e8c-25624936.pdf?src-supplier=RSComponents, ComponentLink4URL=https://datasheet.ciiva.com/25624/0900766b81151e8c-25624936.pdf?src-supplier=RSComponents, ComponentLink5Description=https://datasheet.ciiva.com/15137/getdatasheetpartid-75159-15137378.pdf?src-supplier=Verical, ComponentLink5URL=https://datasheet.ciiva.com/15137/getdatasheetpartid-75159-15137378.pdf?src-supplier=Verical, ComponentLink6Description=https://datasheet.ciiva.com/48532/ds30896-48532645.pdf?src-supplier=Avnet, ComponentLink6URL=https://datasheet.ciiva.com/48532/ds30896-48532645.pdf?src-supplier=Avnet, ComponentLink7Description=https://datasheet.ciiva.com/1188/ds30896-1188422.pdf?src-supplier=Element14, ComponentLink7URL=https://datasheet.ciiva.com/1188/ds30896-1188422.pdf?src-supplier=Element14, ComponentLink8Description=https://datasheet.ciiva.com/16200/ds30896-16200842.pdf?src-supplier=Future+Electronics, ComponentLink8URL=https://datasheet.ciiva.com/16200/ds30896-16200842.pdf?src-supplier=Future+Electronics, ComponentLink9Description=https://datasheet.ciiva.com/17323/ds30896-17323945.pdf?src-supplier=Avnet+Europe, ComponentLink9URL=https://datasheet.ciiva.com/17323/ds30896-17323945.pdf?src-supplier=Avnet+Europe, ComponentLink10Description=https://datasheet.ciiva.com/15137/getdatasheetpartid-44394-15137140.pdf?src-supplier=Verical, ComponentLink10URL=https://datasheet.ciiva.com/15137/getdatasheetpartid-44394-15137140.pdf?src-supplier=Verical, ComponentLink11Description=https://datasheet.ciiva.com/34301/874832-34301640.pdf?src-supplier=Jameco, ComponentLink11URL=https://datasheet.ciiva.com/34301/874832-34301640.pdf?src-supplier=Jameco, ComponentLink12Description=https://datasheet.ciiva.com/931/nds7002a-931794.pdf?src-supplier=Digi-Key, ComponentLink12URL=https://datasheet.ciiva.com/931/nds7002a-931794.pdf?src-supplier=Digi-Key, ComponentLink13Description=https://datasheet.ciiva.com/931/nds7002a-931795.pdf?src-supplier=Digi-Key, ComponentLink13URL=https://datasheet.ciiva.com/931/nds7002a-931795.pdf?src-supplier=Digi-Key, ComponentLink14Description=https://datasheet.ciiva.com/931/nds7002a-931796.pdf?src-supplier=Digi-Key, ComponentLink14URL=https://datasheet.ciiva.com/931/nds7002a-931796.pdf?src-supplier=Digi-Key, ComponentLink15Description=https://datasheet.ciiva.com/4441/2n7002-8405-4441164.pdf?src-supplier=Mouser, ComponentLink15URL=https://datasheet.ciiva.com/4441/2n7002-8405-4441164.pdf?src-supplier=Mouser, ComponentLink16Description=https://datasheet.ciiva.com/46382/660093-46382951.pdf?src-supplier=Element14, ComponentLink16URL=https://datasheet.ciiva.com/46382/660093-46382951.pdf?src-supplier=Element14, ComponentLink17Description=https://datasheet.ciiva.com/16801/nds7002a-16801806.pdf?src-supplier=Future+Electronics, ComponentLink17URL=https://datasheet.ciiva.com/16801/nds7002a-16801806.pdf?src-supplier=Future+Electronics, ComponentLink18Description=https://datasheet.ciiva.com/22681/660093-22681829.pdf?src-supplier=Element14, ComponentLink18URL=https://datasheet.ciiva.com/22681/660093-22681829.pdf?src-supplier=Element14, ComponentLink19Description=https://datasheet.ciiva.com/22681/660093-22681830.pdf?src-supplier=Element14, ComponentLink19URL=https://datasheet.ciiva.com/22681/660093-22681830.pdf?src-supplier=Element14, ComponentLink20Description=https://datasheet.ciiva.com/28548/660093-28548223.pdf?src-supplier=Element14, ComponentLink20URL=https://datasheet.ciiva.com/28548/660093-28548223.pdf?src-supplier=Element14, Contact Plating=Tin,Matte, Current Rating=280mA, Drain to Source Voltage (Vdss)=60V, Dual Supply Voltage=60V, Element Configuration=Single, Lead Free="Lead Free", Manufacturer Part Number 1=NDS7002A, Mount="Surface Mount", Nominal Vgs=2.1V, Number of Elements=1, Number of Pins=3, Packaging="Tape and Reel", Power Dissipation=300mW, Pricing 1="1=0.38000, 10=0.28600, 25=0.25040, 100=0.16190, 500=0.10724, 1000=0.08222 (USD)", Radiation Hardening=No, Rds On Max=2R, REACH SVHC="No SVHC", RoHS=Yes, RoHS Compliant=Yes, Stock 1=640812, Supplier 1=Digi-Key, Voltage=60V, Voltage Rating (DC)=60V, Width=3.05mm
Q700: "MOSFET N-CH 60V 300MA SOT23-3", Case/Package=SOT-23, Continuous Drain Current (ID)=380mA, Drain to Source Breakdown Voltage=60V, Drain to Source Resistance=3R, Drain-source On Resistance-Max=2R, Gate to Source Voltage (Vgs)=20V, Input Capacitance=50pF, Manufacturer 1=Diodes, Manufacturer Part Number 1=2N7002K-7, Max Operating Temperature=150°C, Max Power Dissipation=540mW, Min Operating Temperature=-55°C, Package Quantity=3000, Supplier Part Number 1=2N7002K-7DICT-ND, Threshold Voltage=1.6V, Category=MOSFETs, ComponentLink1Description=https://datasheet.ciiva.com/29746/dmn6140l-29746783.pdf?src-supplier=Digi-Key, ComponentLink1URL=https://datasheet.ciiva.com/29746/dmn6140l-29746783.pdf?src-supplier=Digi-Key, ComponentLink2Description=https://datasheet.ciiva.com/4444/ds30896-81375-4444887.pdf?src-supplier=Mouser, ComponentLink2URL=https://datasheet.ciiva.com/4444/ds30896-81375-4444887.pdf?src-supplier=Mouser, ComponentLink3Description=https://datasheet.ciiva.com/1254/ds30896-1254496.pdf?src-supplier=Newark, ComponentLink3URL=https://datasheet.ciiva.com/1254/ds30896-1254496.pdf?src-supplier=Newark, ComponentLink4Description=https://datasheet.ciiva.com/25624/0900766b81151e8c-25624936.pdf?src-supplier=RSComponents, ComponentLink4URL=https://datasheet.ciiva.com/25624/0900766b81151e8c-25624936.pdf?src-supplier=RSComponents, ComponentLink5Description=https://datasheet.ciiva.com/15137/getdatasheetpartid-75159-15137378.pdf?src-supplier=Verical, ComponentLink5URL=https://datasheet.ciiva.com/15137/getdatasheetpartid-75159-15137378.pdf?src-supplier=Verical, ComponentLink6Description=https://datasheet.ciiva.com/48532/ds30896-48532645.pdf?src-supplier=Avnet, ComponentLink6URL=https://datasheet.ciiva.com/48532/ds30896-48532645.pdf?src-supplier=Avnet, ComponentLink7Description=https://datasheet.ciiva.com/1188/ds30896-1188422.pdf?src-supplier=Element14, ComponentLink7URL=https://datasheet.ciiva.com/1188/ds30896-1188422.pdf?src-supplier=Element14, ComponentLink8Description=https://datasheet.ciiva.com/16200/ds30896-16200842.pdf?src-supplier=Future+Electronics, ComponentLink8URL=https://datasheet.ciiva.com/16200/ds30896-16200842.pdf?src-supplier=Future+Electronics, ComponentLink9Description=https://datasheet.ciiva.com/17323/ds30896-17323945.pdf?src-supplier=Avnet+Europe, ComponentLink9URL=https://datasheet.ciiva.com/17323/ds30896-17323945.pdf?src-supplier=Avnet+Europe, Drain to Source Voltage (Vdss)=60V, Element Configuration=Single, Fall Time=9.9ns, Height=1mm, Lead Free="Lead Free", Length=2.9mm, Mount="Surface Mount", Nominal Vgs=1.6V, Number of Channels=1, Number of Elements=1, Number of Pins=3, On-State Resistance=2R, Packaging="Tape and Reel", Polarity=N-CHANNEL, Power Dissipation=540mW, Pricing 1="1=0.22000, 10=0.18300, 25=0.15360, 100=0.09720, 500=0.06394, 1000=0.04348 (USD)", Radiation Hardening=No, Rds On Max=2R, REACH SVHC="No SVHC", Rise Time=3.4ns, RoHS=Yes, RoHS Compliant=Yes, Series=-, Stock 1=643550, Supplier 1=Digi-Key, Turn-Off Delay Time=15.7ns, Turn-On Delay Time=3.9ns, Weight=0.000282oz, Width=1.3mm
R200: library part RES_0805_K_030.00, "Res Thick Film 0805 30K Ohm 1% 0.125W(1/8W) ±100ppm/°C Pad SMD Automotive T/R", Case Code (Imperial)=0805, Case Code (Metric)=2012, Manufacturer 1=Panasonic, Manufacturer Part Number 1=ERJ-6ENF3002V, Max Operating Temperature=155°C, Max Power Dissipation=125mW, Min Operating Temperature=-55°C, Package Quantity=1, Resistance Tolerance=1%, Resistor Type="Thick Film", Supplier Part Number 1=P30.0KCCT-ND, Temperature Coefficient=100ppm/°C, Voltage Rating=150V, Case/Package=0805, Category="Chip SMD Resistors", ComponentLink1Description=https://datasheet.ciiva.com/11821/0900766b80f80784-11821600.pdf?src-supplier=RSComponents, ComponentLink1URL=https://datasheet.ciiva.com/11821/0900766b80f80784-11821600.pdf?src-supplier=RSComponents, ComponentLink2Description=https://datasheet.ciiva.com/9117/aoa0000ce2-9117485.pdf?src-supplier=Avnet, ComponentLink2URL=https://datasheet.ciiva.com/9117/aoa0000ce2-9117485.pdf?src-supplier=Avnet, ComponentLink3Description=https://datasheet.ciiva.com/24124/aoa0000ce2-24124393.pdf?src-supplier=Mouser, ComponentLink3URL=https://datasheet.ciiva.com/24124/aoa0000ce2-24124393.pdf?src-supplier=Mouser, ComponentLink4Description=https://datasheet.ciiva.com/30169/aoa0000ce2-30169447.pdf?src-supplier=Onlinecomponents.com, ComponentLink4URL=https://datasheet.ciiva.com/30169/aoa0000ce2-30169447.pdf?src-supplier=Onlinecomponents.com, ComponentLink5Description=https://datasheet.ciiva.com/17210/aoa0000ce2-17210478.pdf?src-supplier=Avnet+Europe, ComponentLink5URL=https://datasheet.ciiva.com/17210/aoa0000ce2-17210478.pdf?src-supplier=Avnet+Europe, ComponentLink6Description=https://datasheet.ciiva.com/22673/1678782-22673293.pdf?src-supplier=Element14, ComponentLink6URL=https://datasheet.ciiva.com/22673/1678782-22673293.pdf?src-supplier=Element14, ComponentLink7Description=https://datasheet.ciiva.com/28565/1694929-28565193.pdf?src-supplier=Element14, ComponentLink7URL=https://datasheet.ciiva.com/28565/1694929-28565193.pdf?src-supplier=Element14, ComponentLink8Description=https://datasheet.ciiva.com/46441/1678782-46441405.pdf?src-supplier=Element14, ComponentLink8URL=https://datasheet.ciiva.com/46441/1678782-46441405.pdf?src-supplier=Element14, ComponentLink9Description=https://datasheet.ciiva.com/46441/1678782-46441406.pdf?src-supplier=Element14, ComponentLink9URL=https://datasheet.ciiva.com/46441/1678782-46441406.pdf?src-supplier=Element14, ComponentLink10Description=https://datasheet.ciiva.com/16512/aoa0000ce2-16512236.pdf?src-supplier=Avnet+Asia, ComponentLink10URL=https://datasheet.ciiva.com/16512/aoa0000ce2-16512236.pdf?src-supplier=Avnet+Asia, ComponentLink11Description=https://datasheet.ciiva.com/7711/1678782-7711062.pdf?src-supplier=Element14, ComponentLink11URL=https://datasheet.ciiva.com/7711/1678782-7711062.pdf?src-supplier=Element14, Construction=Rectangular, Contact Plating=Tin, Depth=1.25mm, Features="Automotive AEC-Q200", Height=0.6mm, Lead Free="Lead Free", Length=2mm, Military Standard=Not, Mount="Surface Mount", Number of Terminations=2, Packaging="Tape and Reel", Power Rating=125mW, Pricing 1="1=0.10000, 10=0.07500, 100=0.02880, 1000=0.01265, 2500=0.01092 (USD)", Radiation Hardening=No, REACH SVHC=Unknown, Resistance=30K, RoHS=Yes, RoHS Compliant=Yes, Series=ERJ, Stock 1=296893, Supplier 1=Digi-Key, Technology="THICK FILM", Termination=SMD/SMT, Tolerance=1%, Voltage Rating (DC)=150V, Weight=0.000194oz, Width=0.049inch
R201 R202 R400 R401 R402 R403 R506 R507 R508 R509 R510 R511 R514 R515 R601 R602: "RES SMD 10K OHM 1% 1/8W 0805", Case Code (Imperial)=0805, Case Code (Metric)=2012, Manufacturer 1=Yageo, Manufacturer Part Number 1=RC0805FR-0710KL, Max Operating Temperature=155°C, Max Power Dissipation=125mW, Min Operating Temperature=-55°C, Package Quantity=1, Resistance=10kR, Resistance Tolerance=1%, Resistor Type="Thick Film", Supplier Part Number 1=311-10.0KCRCT-ND, Temperature Coefficient=100ppm/°C, Voltage Rating=150V, Case/Package=0805, Category="Chip SMD Resistors", ComponentLink1Description=https://datasheet.ciiva.com/11808/0900766b8106beab-11808151.pdf?src-supplier=RSComponents, ComponentLink1URL=https://datasheet.ciiva.com/11808/0900766b8106beab-11808151.pdf?src-supplier=RSComponents, ComponentLink2Description=https://datasheet.ciiva.com/12669/rc0805-12669688.pdf?src-supplier=Mouser, ComponentLink2URL=https://datasheet.ciiva.com/12669/rc0805-12669688.pdf?src-supplier=Mouser, ComponentLink3Description=https://datasheet.ciiva.com/46447/444164-46447563.pdf?src-supplier=Element14, ComponentLink3URL=https://datasheet.ciiva.com/46447/444164-46447563.pdf?src-supplier=Element14, ComponentLink4Description=https://datasheet.ciiva.com/2456/pyu-r-int-thick-7-2456972.pdf?src-supplier=Digi-Key, ComponentLink4URL=https://datasheet.ciiva.com/2456/pyu-r-int-thick-7-2456972.pdf?src-supplier=Digi-Key, ComponentLink5Description=https://datasheet.ciiva.com/2456/pyu-r-int-thick-7-2456973.pdf?src-supplier=Digi-Key, ComponentLink5URL=https://datasheet.ciiva.com/2456/pyu-r-int-thick-7-2456973.pdf?src-supplier=Digi-Key, ComponentLink6Description=https://datasheet.ciiva.com/2456/pyu-r-int-thick-7-2456974.pdf?src-supplier=Digi-Key, ComponentLink6URL=https://datasheet.ciiva.com/2456/pyu-r-int-thick-7-2456974.pdf?src-supplier=Digi-Key, ComponentLink7Description=https://datasheet.ciiva.com/16747/rc0805-16747087.pdf?src-supplier=Future+Electronics, ComponentLink7URL=https://datasheet.ciiva.com/16747/rc0805-16747087.pdf?src-supplier=Future+Electronics, Construction=Rectangular, Depth=1.25mm, Features="Moisture Resistant", Height=0.024inch, Lead Free="Lead Free", Length=2mm, Military Standard=Not, Number of Terminations=2, Packaging="Tape and Reel", Power Rating=125mW, Pricing 1="1=0.10000, 10=0.04200, 100=0.01690, 1000=0.00759, 2500=0.00659 (USD)", REACH SVHC=Unknown, RoHS=Yes, RoHS Compliant=Yes, Series=RC, Size Code=0805, Stock 1=7562122, Supplier 1=Digi-Key, Technology="THICK FILM", Termination=SMD/SMT, Tolerance=1%, Width=0.049inch
R500 R501 R502 R503 R504 R505 R512 R513: library part RES_0805_R_330.00, "RES 330 OHM 1% 1/8W 0805", Case Code (Imperial)=0805, Case Code (Metric)=2012, Manufacturer 1="Stackpole Electronics", Manufacturer Part Number 1=RMCF0805FT330R, Max Operating Temperature=155°C, Max Power Dissipation=125mW, Min Operating Temperature=-55°C, Resistance=330R, Resistor Type="Thick Film", Supplier Part Number 1=RMCF0805FT330RCT-ND, Temperature Coefficient=100ppm/°C, Tolerance=1%, Case/Package=0805, Category="Chip SMD Resistors", ComponentLink1Description=http://components.arrow.com/part/dataview/40963487S9848862N1174?src-supplier=Arrow+Electronics, ComponentLink1URL=http://components.arrow.com/part/dataview/40963487S9848862N1174?src-supplier=Arrow+Electronics, ComponentLink2Description=https://www.seielect.com/catalog/SEI-RMCF_RMCP.pdf?src-supplier=Avnet, ComponentLink2URL=https://www.seielect.com/catalog/SEI-RMCF_RMCP.pdf?src-supplier=Avnet, ComponentLink3Description=https://www.seielect.com/Catalog/SEI-RMCF_RMCP.pdf?src-supplier=Digi-Key, ComponentLink3URL=https://www.seielect.com/Catalog/SEI-RMCF_RMCP.pdf?src-supplier=Digi-Key, ComponentLink4Description=https://www.seielect.com/catalog/SEI-Packaging.pdf?src-supplier=Digi-Key, ComponentLink4URL=https://www.seielect.com/catalog/SEI-Packaging.pdf?src-supplier=Digi-Key, ComponentLink5Description=https://www.verical.com/server-webapp/html/getDatasheet?partID=559884&src-supplier=Verical, ComponentLink5URL=https://www.verical.com/server-webapp/html/getDatasheet?partID=559884&src-supplier=Verical, Construction=Rectangular, Contact Plating=Tin,Matte, Depth=1.25mm, Features="Automotive AEC-Q200", Height=0.026inch, Lead Free="Lead Free", Length=0.079inch, Military Standard=Not, Mount="Surface Mount", Number of Terminations=2, Packaging="Tape and Reel", Pricing 1="1=0.10000, 10=0.02700, 100=0.01090, 1000=0.00488, 2500=0.00423 (USD)", Radiation Hardening=No, RoHS=Yes, RoHS Compliant=Yes, Series=RMCF, Stock 1=205996, Supplier 1=Digi-Key, Width=0.049inch
R600 R603 R604 R605 R606: library part RES_0805_K_047.50, "Res Thick Film 2.0 x 1.2 mm 47.5K Ohm 1% 0.125W(1/8W) 100ppm/ C Molded SMD Paper T/R", Case Code (Imperial)=0805, Case Code (Metric)=2012, Manufacturer 1=Yageo, Manufacturer Part Number 1=RC0805FR-0747K5L, Max Operating Temperature=155°C, Max Power Dissipation=125mW, Min Operating Temperature=-55°C, Package Quantity=1, Resistor Type="Thick Film", Supplier Part Number 1=311-47.5KCRCT-ND, Temperature Coefficient=100ppm/°C, Tolerance=1%, Voltage Rating=150V, Case/Package=0805, Category="Chip SMD Resistors", ComponentLink3Description=https://datasheet.ciiva.com/12667/rc0805-12667415.pdf?src-supplier=Mouser, ComponentLink3URL=https://datasheet.ciiva.com/12667/rc0805-12667415.pdf?src-supplier=Mouser, Depth=1.25mm, Features="Moisture Resistant", Height=0.024inch, Lead Free="Lead Free", Length=0.079inch, Mount="Surface Mount", Number of Terminations=2, Packaging="Tape and Reel", Power Rating=125mW, Pricing 1="1=0.10000, 10=0.04200, 100=0.01690, 1000=0.00759, 2500=0.00659 (USD)", Resistance=47.5K, RoHS=Yes, RoHS Compliant=Yes, Series=RC, Size Code=0805, Stock 1=246219, Supplier 1=Digi-Key, Technology="THICK FILM", Termination=SMD/SMT, Voltage Rating (DC)=150V, Width=0.049inch
R700: "RES 10K 1/10W 1% 0805 SMD", Case Code (Imperial)=0805, Case Code (Metric)=2012, Manufacturer 1=Yageo, Manufacturer Part Number 1=RC0805FR-0710KL, Max Operating Temperature=155°C, Max Power Dissipation=125mW, Min Operating Temperature=-55°C, Package Quantity=1, Resistance=10K, Supplier Part Number 1=311-10.0KCRDKR-ND, Temperature Coefficient=100ppm/°C, Tolerance=1%, Voltage Rating=150V, Case/Package=0805, ComponentLink1Description=https://datasheet.ciiva.com/11808/0900766b8106beab-11808151.pdf?src-supplier=RSComponents, ComponentLink1URL=https://datasheet.ciiva.com/11808/0900766b8106beab-11808151.pdf?src-supplier=RSComponents, ComponentLink2Description=https://datasheet.ciiva.com/12669/rc0805-12669688.pdf?src-supplier=Mouser, ComponentLink2URL=https://datasheet.ciiva.com/12669/rc0805-12669688.pdf?src-supplier=Mouser, ComponentLink3Description=https://datasheet.ciiva.com/46447/444164-46447563.pdf?src-supplier=Element14, ComponentLink3URL=https://datasheet.ciiva.com/46447/444164-46447563.pdf?src-supplier=Element14, ComponentLink4Description=https://datasheet.ciiva.com/2456/pyu-r-int-thick-7-2456972.pdf?src-supplier=Digi-Key, ComponentLink4URL=https://datasheet.ciiva.com/2456/pyu-r-int-thick-7-2456972.pdf?src-supplier=Digi-Key, ComponentLink5Description=https://datasheet.ciiva.com/2456/pyu-r-int-thick-7-2456973.pdf?src-supplier=Digi-Key, ComponentLink5URL=https://datasheet.ciiva.com/2456/pyu-r-int-thick-7-2456973.pdf?src-supplier=Digi-Key, ComponentLink6Description=https://datasheet.ciiva.com/2456/pyu-r-int-thick-7-2456974.pdf?src-supplier=Digi-Key, ComponentLink6URL=https://datasheet.ciiva.com/2456/pyu-r-int-thick-7-2456974.pdf?src-supplier=Digi-Key, ComponentLink7Description=https://datasheet.ciiva.com/16747/rc0805-16747087.pdf?src-supplier=Future+Electronics, ComponentLink7URL=https://datasheet.ciiva.com/16747/rc0805-16747087.pdf?src-supplier=Future+Electronics, Composition="Thick Film", Depth=1.25mm, Features="Moisture Resistant", Height=0.024inch, Lead Free="Lead Free", Length=2mm, Military Standard=Not, Number of Terminations=2, Packaging="Tape and Reel", Power Rating=125mW, Pricing 1="1=0.10000, 10=0.04000, 100=0.01630, 1000=0.00731, 2500=0.00635 (USD)", REACH SVHC=Unknown, RoHS=Yes, Stock 1=23045964, Supplier 1=Digi-Key, Termination=SMD/SMT, Width=0.049inch